# Altium PCB MB1520.PcbDoc (part 4 of 7)
Units mm, origin at the board's own origin, x right, y up, seen from the top; angles counter-clockwise.
Board outline 159 x 88 mm, 6 copper layers (Top Layer, Signal Layer 1, Signal Layer 2, Signal Layer 3, Signal Layer 4, Bottom Layer), stack 1.572 mm thick; 473 components, 377 nets, 1832 pads, 1378 vias.
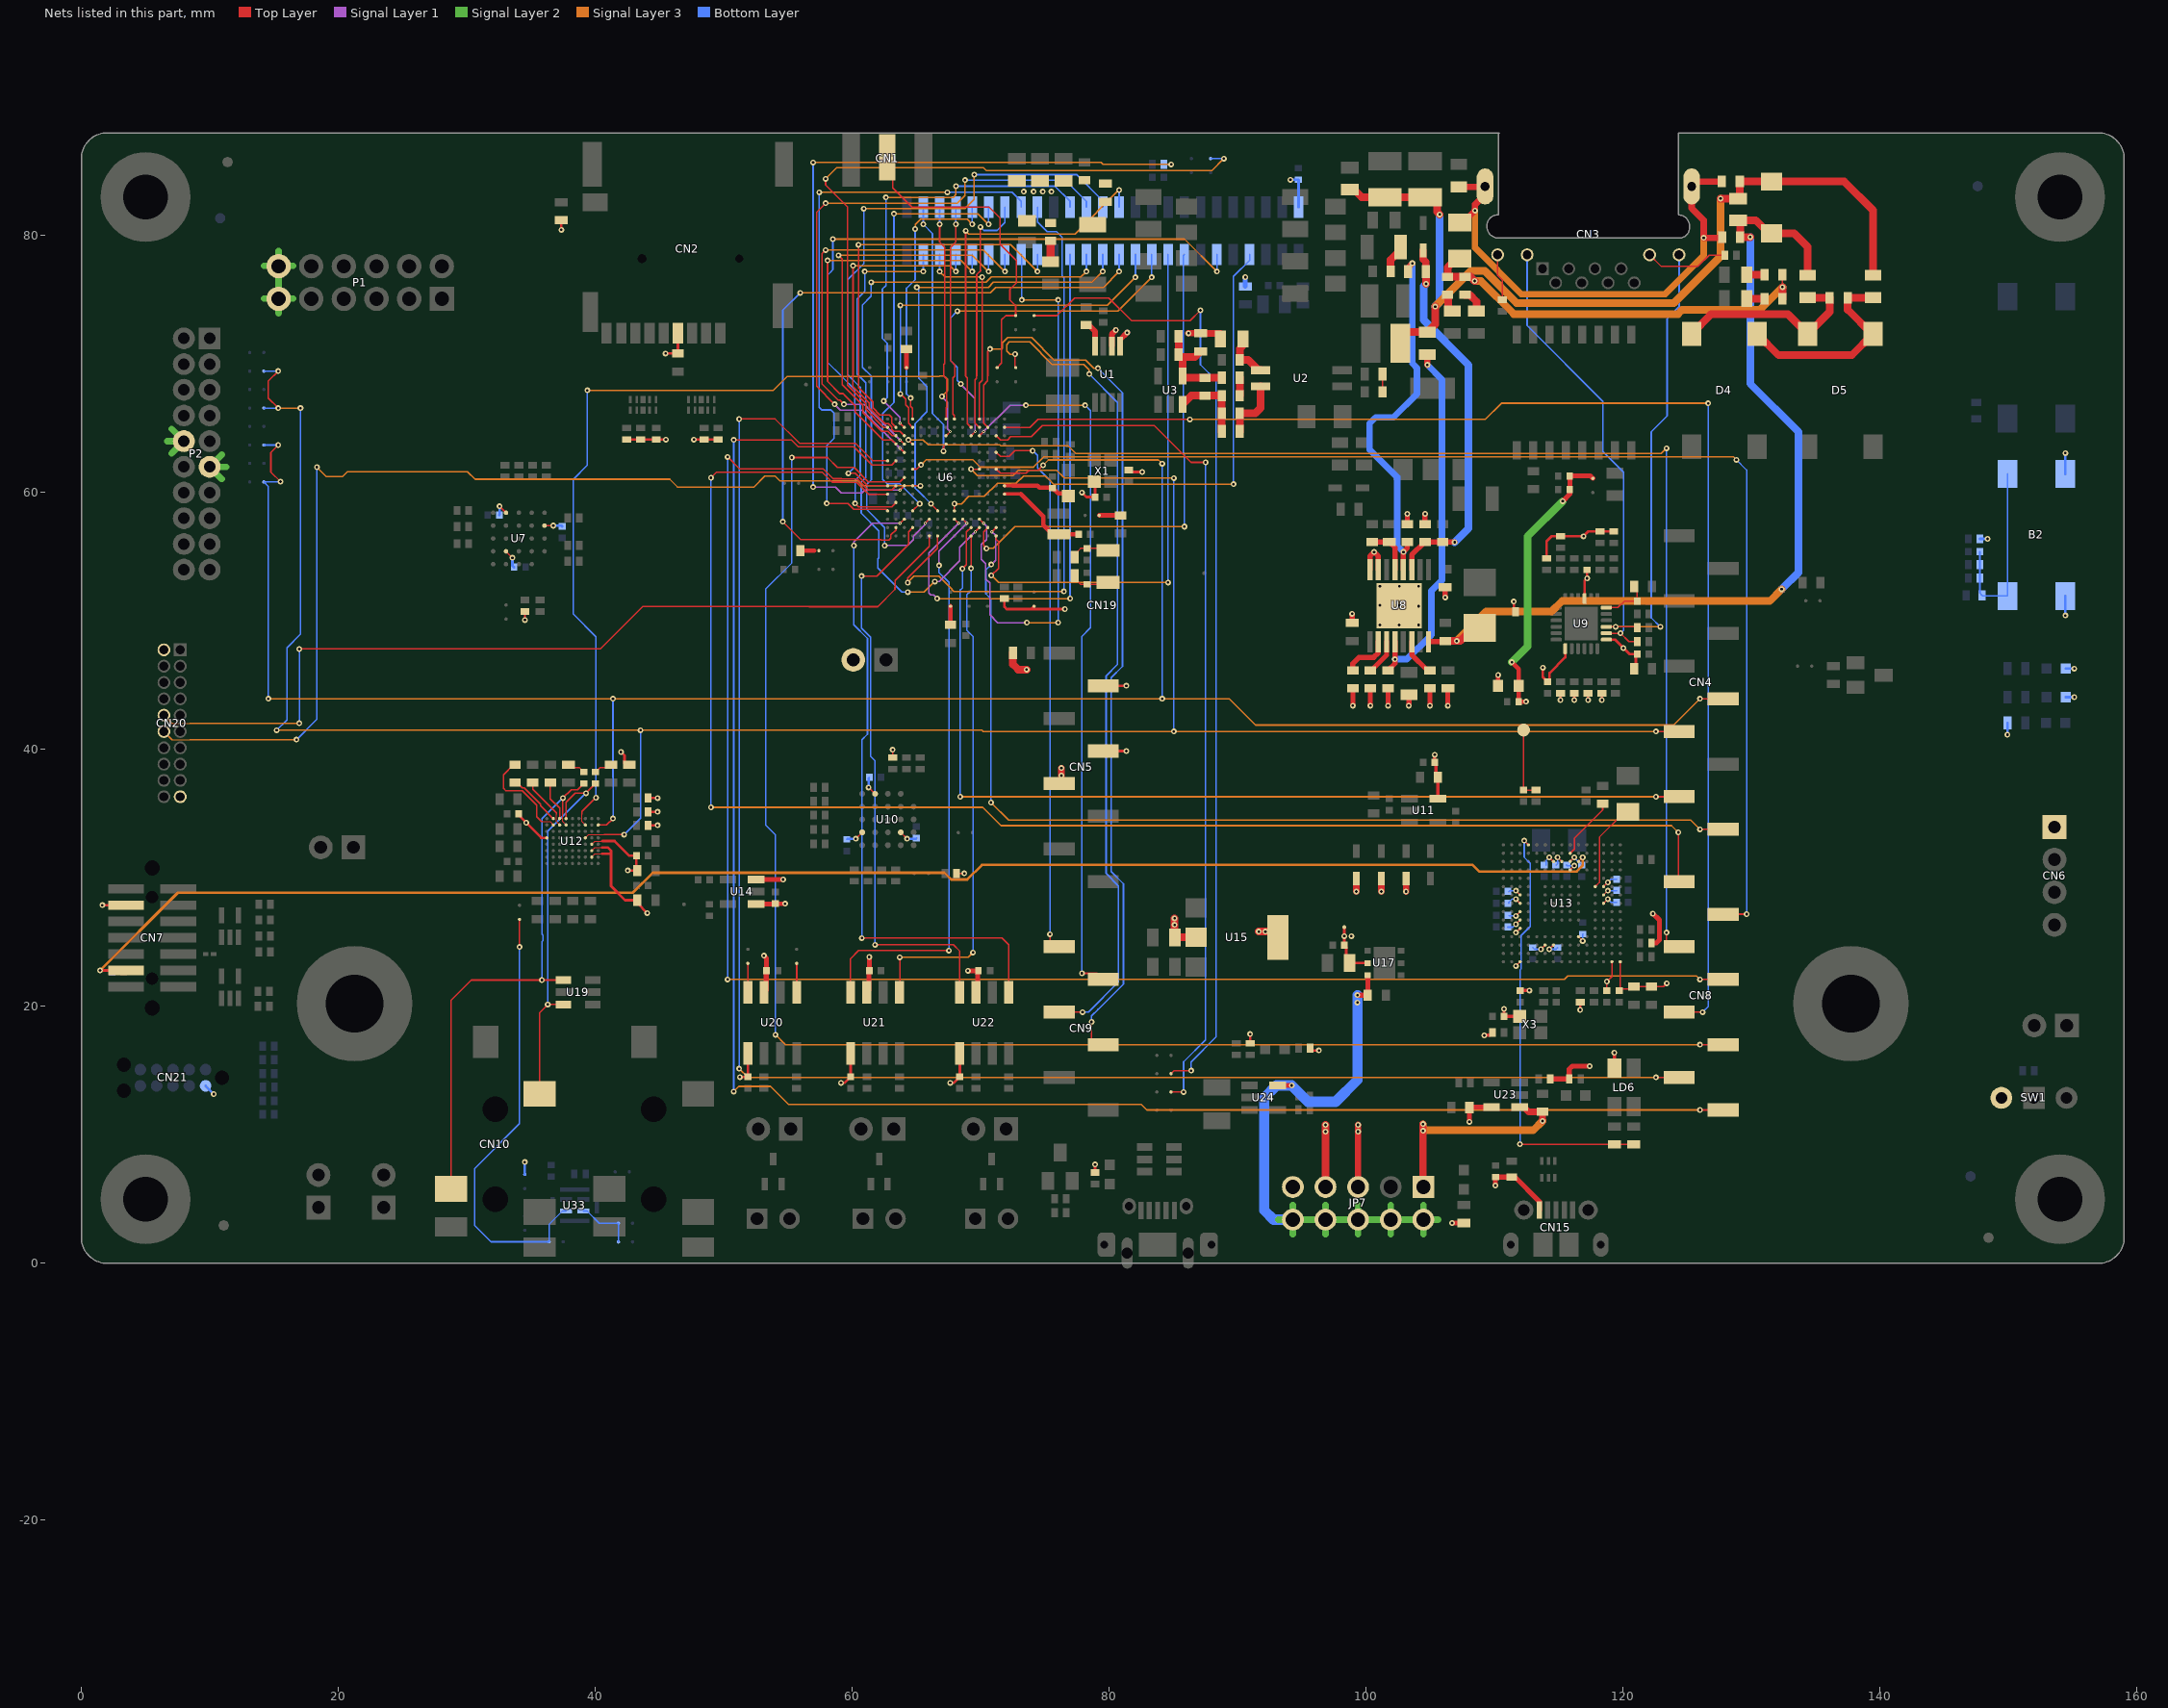
[diagram p7: the nets of this part, all layers, seen from the top]

## Via types
v1: diameter 0.45, hole 0.2, Top Layer to Bottom Layer, tented both sides, 1099 vias
v2: diameter 0.25, hole 0.1, Top Layer to Signal Layer 1, tented both sides, 217 vias
v3: diameter 0.25, hole 0.1, Signal Layer 4 to Bottom Layer, tented both sides, 53 vias
v4: diameter 0.6, hole 0.3, Top Layer to Bottom Layer, tented both sides, 9 vias

## Nets (pads, with @x,y where several pads share a name; then routed paths per layer and width w, separated by ;. In a path a pad name is that pad's centre, name@x,y a point inside that pad or via, vN(x,y) a via of type N, cw(c..) or ccw(c..) an arc to the next point about the centre after c; other vN are vias at no path point) (continued)
3V3: B2.1 B2.2 C24.1 C37.2 C46.1 C77.1 C81.1 C83.2 C87.2 C88.2 C95.1 C96.2 C109.2 C110.2 C111.2 C116.1 C132.2 C136.2 C139.2 C140.2 C141.2 C143.2 CN2.4 CN5.2 CN5.4 CN7.3 CN19.50 CN20.2 CN20.19 CN21.1 JP1.2 L4.2 LD1.1 LD2.1 P1.6 P1.12 R3.2 R27.2 R28.2 R29.2 R30.2 R31.2 R41.2 R49.2 R50.2 R51.1 R55.2 R63.1 R65.2 R67.1 R81.2 R86.1 R90.2 R92.2 R94.1 R102.2 R112.2 R117.2 R118.2 R132.2 R140.2 R145.2 SB22.1 SB36.2 SW1.2 TP5.1 U7.B4 U7.D1 U7.E4 U9.9 U10.B4 U10.D1 U10.E4 U12.B2 U12.C2 U12.D2 U12.E9 U14.1 U14.3 U17.2 U20.5 U21.5 U22.5 X1.4 | length 106.5
  Top Layer w0.09: U12.B2@39.725,31.625 39.975,31.875 40.55,31.875 ; U12.C2@39.725,32.125 39.975,32.375 40.55,32.375 ; U12.D2@39.725,32.625 39.975,32.875 40.55,32.875
  Top Layer w0.127: v1(32.55,58.925) U7.E4@33.05,58.425 ; U7.B4@33.05,55.425 v1(33.55,54.925) ; v1(34.525,50.075) R65.2@34.525,50.75 ; U7.D1@36.05,57.425 v1(36.725,57.425) ; v1(60.275,33.05) U10.E4@60.775,33.55 ; v1(61.275,37.05) U10.D1@61.775,36.55 ; R81.2@63.15,39.375 v1(63.15,39.975) ; U10.B4@63.775,33.55 v1(64.275,33.05) ; R102.2@68.125,30.35 v1(68.725,30.35)
  Top Layer w0.2: v1(1.629,27.879) CN7.3@3.479,27.879 ; C77.1@34.025,34.975 34.025,34.9 35.8,33.125 U12.E9@36.225,33.125 ; v1(37.35,80.45) R3.2@37.35,81.2 ; 40.55,31.875 41.175,31.875 41.225,31.925 ; 40.55,32.375 40.976,32.375 41.225,32.126 41.225,31.925 ; 40.55,32.875 41.5,32.875 42.65,31.725 C81.1@43.2,31.725 43.2,30.65 C83.2@43.275,30.575 v1(42.525,30.575) ; v1(42,39.8) 42.275,39.525 42.275,38.9 42.35,38.825 R86.1@42.65,38.825 ; R27.2@42.45,64.125 R28.2@43.525,64.125 R29.2@44.75,64.125 v1(45.5,64.125) ; v1(44.05,27.275) 43.275,28.05 C88.2@43.275,28.275 42.325,28.275 41.225,29.375 41.225,31.925 ; R94.1@44.1,34.1 v1(44.85,34.1) ; R92.2@44.1,35.15 v1(44.85,35.15) ; R90.2@44.1,36.225 v1(44.85,36.225) ; v1(45.475,70.825) C24.1@46.425,70.825 CN2.4@46.425,72.4 ; v1(47.675,64.125) R30.2@48.475,64.125 R31.2@49.55,64.125 ; v1(51.25,14.5) 51.85,14.5 C109.2@51.87,14.48 ; U20.5@51.87,16.35 51.875,16.345 C109.2@51.875,14.525 ; v1(59.125,14.05) 59.4,14.05 C110.2@59.875,14.525 59.875,16.345 U21.5@59.87,16.35 ; v1(67.625,14.05) 67.9,14.05 C111.2@68.375,14.525 68.375,16.345 U22.5@68.37,16.35 ; R63.1@71.85,51.75 71.85,51.098 72.023,50.925 73.925,50.925 ; SB22.1@74.15,51.15 73.925,50.925 ; v1(76.55,50.925) 73.925,50.925 ; v1(77.875,60) 78.225,59.65 C37.2@78.9,59.65 78.9,60.8 X1.4@78.85,60.85 ; R132.2@78.9,7.075 v1(78.9,7.7) ; CN5.4@79.541,39.88 v1(81.335,39.88) ; CN5.2@79.541,44.96 v1(81.335,44.96) ; R41.2@81.525,61.75 81.675,61.6 v1(82.575,61.6) ; R117.2@90.975,17.125 v1(90.975,17.85) ; R118.2@95.637,16.764 95.826,16.575 v1(96.325,16.575) ; TP5.1@98.325,26.2 TP5.1@98.3,26.175 v1(98.3,25.475) C95.1@98.3,24.775 98.45,24.625 98.45,23.625 C96.2@98.7,23.375 U17.2@100.125,23.375 ; v1(111.498,51.515) 111.498,50.852 R67.1@111.625,50.725 ; R55.2@114.05,54.875 114.05,56.225 114.425,56.6 R51.1@115.125,56.6 v1(116.925,56.6) 117.3,56.975 R49.2@118.2,56.975 R50.2@119.275,56.975 ; v1(116.661,19.731) R112.2@116.661,20.339 ; U9.9@117,51.75 117,53.125 v1(117.2,53.325) C46.1@117.2,53.975
  Top Layer w0.35: U14.1@52.525,27.975 54,27.975 C87.2@54.025,28 v1(54.775,28) ; U14.3@52.525,29.875 v1(54.625,29.875) ; L4.2@110.275,44.95 v1(110.275,45.8)
  Signal Layer 2 w0.5: 14.2,75.11 P1.6@15.35,75.11 ; 14.2,77.65 P1.12@15.35,77.65 ; 15.35,73.96 P1.6@15.35,75.11 ; 15.35,78.8 P1.12@15.35,77.65 ; 16.5,75.11 P1.6@15.35,75.11 ; 16.5,77.65 P1.12@15.35,77.65 ; P1.6@15.35,75.11 P1.12@15.35,77.65
  Bottom Layer w0.127: C143.2@59.575,33 C143.2@59.625,33.05 ; C140.2@61.275,37.775 C140.2@61.325,37.825 ; C141.2@64.95,33.05 C141.2@65,33.1
  Bottom Layer w0.2: CN21.1@9.665,13.815 v1(10.305,13.175) ; C132.2@32.525,58.25 32.55,58.275 v1(32.55,58.925) ; v1(33.55,54.925) 33.55,54.315 C139.2@33.675,54.19 ; SB36.2@34.512,6.919 v1(34.512,7.887) ; v1(36.725,57.425) 37.375,57.425 C136.2@37.425,57.375 ; C143.2@59.625,33.05 v1(60.275,33.05) ; v1(61.275,37.05) C140.2@61.275,37.775 ; v1(64.275,33.05) C141.2@64.95,33.05 ; v1(94.1,84.35) C116.1@94.725,84.35 94.74,84.335 CN19.50@94.74,82.217 ; R140.2@147.775,56.4 v1(148.375,56.4) ; v1(149.925,41.15) R145.2@149.925,42.075 ; v1(154.425,50.425) B2.1@154.425,51.95 ; B2.2@154.425,61.45 v1(154.425,63.075) ; LD1.1@154.45,44.075 v1(155.125,44.075) ; LD2.1@154.45,46.3 v1(155.125,46.3)
  other v1: 98.85,25.475 34.625,34.3
3V3_STLK: C63.2 C70.2 C101.2 C102.2 C103.2 C105.2 C106.2 C108.2 C144.2 C145.2 C146.2 C147.2 C148.2 C149.2 C150.2 C151.2 C152.2 C153.2 C154.2 C155.2 C156.2 C157.2 CN6.1 LD6.4 R115.1 U11.5 U13.C1 U13.C5 U13.C6 U13.C7 U13.C8 U13.C9 U13.F3 U13.G3 U13.G13 U13.H13 U13.J12 U13.J13 U13.K4 U13.N8 U13.N9 U13.N10 U13.P1 U13.R1 X3.4 | length 33.4
  Top Layer w0.12: v1(111.658,23.152) U13.C1@111.983,23.477 ; v1(111.658,25.752) U13.C5@111.983,26.077 ; v1(111.658,26.402) U13.C6@111.983,26.727 ; v1(111.658,27.052) U13.C7@111.983,27.377 ; v1(111.658,28.352) U13.C8@111.983,28.027 ; v1(111.658,29.002) U13.C9@111.983,28.677 ; v1(113.608,24.452) U13.F3@113.933,24.777 ; v1(114.258,24.452) U13.G3@114.583,24.777 ; v1(114.258,31.602) U13.G13@114.583,31.277 ; v1(114.908,31.602) U13.H13@115.233,31.277 ; U13.J12@115.883,30.627 v1(116.208,30.952) ; U13.J13@115.883,31.277 v1(116.208,31.602) ; U13.K4@116.533,25.427 v1(116.858,25.102) ; U13.N8@118.483,28.027 v1(118.808,28.352) ; U13.N9@118.483,28.677 v1(118.808,29.002) ; U13.N10@118.483,29.327 v1(118.808,29.652) ; C105.2@118.736,21.239 v1(118.736,21.936) 119.133,22.333 U13.P1@119.133,23.477 ; C106.2@119.686,21.239 C106.2@119.783,21.336 ; U13.R1@119.783,23.477 C106.2@119.783,21.336 ; v1(123.4,21.8) 123.139,21.539 C102.2@122.211,21.539 C101.2@120.836,21.539 120.647,21.35 119.797,21.35 C106.2@119.783,21.336
  Top Layer w0.254: v1(105.336,39.586) C63.2@105.336,38.989 105.425,38.901 105.425,38.001 C70.2@105.586,37.839 U11.5@105.586,36.189 ; v1(109.2,17.75) 109.622,17.75 R115.1@109.836,17.964 ; v1(110.736,19.811) C108.2@110.736,19.214 X3.4@111.961,19.214 ; C103.2@111.986,21.239 v1(112.711,21.239) ; v1(119.325,16.4) 119.325,15.201 LD6.4@119.336,15.189
  Bottom Layer w0.12: C155.2@111.025,26.175 111.431,26.175 v1(111.658,26.402) ; C152.2@111.111,28.014 111.111,28.111 111.352,28.352 v1(111.658,28.352) ; C150.2@111.111,28.914 111.199,29.002 v1(111.658,29.002) ; C153.2@111.125,27.05 111.127,27.052 v1(111.658,27.052) ; C157.2@112.975,24.575 113.098,24.452 v1(113.608,24.452) ; C147.2@114,31 114,31.344 v1(114.258,31.602) ; v1(114.258,24.452) 114.777,24.452 C156.2@114.9,24.575 ; C146.2@114.8,31 114.908,31.108 v1(114.908,31.602) ; C145.2@115.6,31 115.648,30.952 v1(116.208,30.952) ; v1(116.208,31.602) 116.208,31.592 C144.2@116.8,31 ; v1(116.858,25.102) 116.858,25.608 C154.2@116.875,25.625 ; v1(118.808,28.352) 119.06,28.1 C151.2@119.5,28.1 ; v1(118.808,29.002) 119.498,29.002 C149.2@119.5,29 ; v1(118.808,29.652) 119.056,29.9 C148.2@119.5,29.9
5V: C98.2 C99.2 C100.2 C107.2 CN5.5 JP7.2 JP7.4 JP7.6 JP7.8 JP7.10 P2.6 P2.15 R107.1 R134.1 R138.1 U1.1 U1.2 U17.3 U20.3 U21.3 U22.3 U24.5 | length 79.1
  Top Layer w0.381: v1(53.125,23.95) 53.325,23.75 C98.2@53.325,22.775 53.3,22.75 53.3,21.26 U20.3@53.14,21.1 ; U21.3@61.14,21.1 61.3,21.26 61.3,22.75 C99.2@61.325,22.775 v1(61.325,23.85) ; v1(69,22.775) C100.2@69.825,22.775 69.775,22.725 69.775,21.235 U22.3@69.64,21.1 ; CN5.5@76.112,37.34 CN5.5@76.3,37.529 ; U24.5@93.125,13.85 v1(94.2,13.85) ; v1(99.32,20.875) C107.2@100.125,20.875 U17.3@100.125,22.425 ; v1(106.686,3.139) R134.1@107.611,3.139 ; R107.1@122.211,24.939 122.589,24.939 122.825,25.175 122.825,26.725 v1(122.325,27.225)
  Top Layer w0.45: U1.2@80.2,71.4 80.2,72.325 v1(80.525,72.65) ; U1.1@80.85,71.4 80.85,71.9 v1(81.4,72.45)
  Top Layer w0.5: v1(76.275,38.552) 76.275,37.554 CN5.5@76.3,37.529
  Signal Layer 2 w0.5: 6.675,64 P2.15@7.975,64 ; 7.025,63.05 P2.15@7.975,64 ; 7.025,64.95 P2.15@7.975,64 ; 10.925,61.05 P2.6@9.975,62 ; 10.925,62.95 P2.6@9.975,62 ; 11.275,62 P2.6@9.975,62 ; 93.145,3.405 JP7.10@94.295,3.405 ; 94.295,2.255 JP7.10@94.295,3.405 ; 94.295,4.555 JP7.10@94.295,3.405 ; 96.835,2.255 JP7.8@96.835,3.405 ; 96.835,4.555 JP7.8@96.835,3.405 ; 99.375,2.255 JP7.6@99.375,3.405 ; 99.375,4.555 JP7.6@99.375,3.405 ; 101.915,2.255 JP7.4@101.915,3.405 ; 101.915,4.555 JP7.4@101.915,3.405 ; 104.455,2.255 JP7.2@104.455,3.405 ; 104.455,4.555 JP7.2@104.455,3.405 ; 105.605,3.405 JP7.2@104.455,3.405 ; JP7.10@94.295,3.405 JP7.8@96.835,3.405 ; JP7.8@96.835,3.405 JP7.6@99.375,3.405 ; JP7.6@99.375,3.405 JP7.4@101.915,3.405 ; JP7.4@101.915,3.405 JP7.2@104.455,3.405
  Bottom Layer w0.381: R138.1@90.6,76.05 v1(90.6,76.775)
  Bottom Layer w0.8: JP7.10@94.295,3.405 92.795,3.405 92.075,4.125 92.075,12.9 93.025,13.85 v1(94.2,13.85) 95.475,12.575 97.625,12.575 99.32,14.27 v1(99.32,20.875)
  other v1: 99.32,20.3 76.275,37.975
5V_POE: C3.2 C4.2 C5.2 C6.2 D10.1 JP7.5 R2.2 R18.2 R20.2 | length 8.8
  Top Layer w0.508: v1(86.175,72.4) 87.101,72.4 R20.2@87.111,72.389 88.661,72.389 R18.2@88.661,71.964 ; JP7.5@99.375,5.945 v1(99.375,10.778) ; v1(103.111,28.939) D10.1@103.111,29.944
  other v1: 99.375,10.25 73.35,83.425 74.125,83.425 74.825,83.425 75.5,83.425
5V_USB_CHGR: C114.2 C115.2 CN15.1 D8.1 JP7.9 R125.2 R126.2 U23.5 U30.1 | length 13.3
  Top Layer w0.4: v1(108.036,11.011) C114.2@108.036,12.139 108.061,12.164 U23.5@109.761,12.164 ; v1(110.061,6.061) C115.2@110.061,6.714 U30.1@111.336,6.714 111.586,6.714 113.475,4.826 CN15.1@113.475,4.15 ; R125.2@114.336,14.364 R126.2@115.811,14.364 115.811,15.111 116.05,15.35 v1(117.4,15.35)
  Top Layer w0.508: v1(99.236,28.939) D8.1@99.236,29.944
5V_USB_STLK: C113.2 JP7.1 U23.1 | length 17.7
  Top Layer w0.508: U23.1@111.961,12.164 112.286,12.164 112.65,11.8 C113.2@113.725,11.8 v1(113.725,11.075)
  Top Layer w0.55: v1(104.425,10.843) v1(104.425,10.315) 104.425,6.1 JP7.1@104.58,5.945
  Signal Layer 3 w0.55: v1(104.425,10.315) v1(104.425,10.843)
  Signal Layer 3 w0.6: v1@104.455,10.35 113,10.35 v1(113.725,11.075)
ADC_IN: CN1.1 SB4.1 SB41.2 | length 25.5
  Top Layer w0.127: CN1.1@62.725,86.1 62.725,84.8 63.15,84.375 63.15,83.715 64.648,82.217 70.658,82.217 71.499,81.376 71.499,79.326 72.775,78.05 72.775,76.325 72.275,75.825 72.275,75 72.725,74.55 SB41.2@72.725,73.775 71.95,73.775 71.625,73.45 71.625,70.075 SB4.1@71.275,69.725
AGND: C40.1 C41.1 C57.2 C58.2 R61.2 R69.2 U8.15 U8.16 | length 8.8
  Top Layer w0.381: R69.2@98.918,49.846 v1(98.918,50.568) ; v1(98.961,43.414) C57.2@98.961,44.764 ; v1(100.336,43.414) C58.2@100.336,44.764
  Top Layer w0.4: U8.16@100.301,53.996 100.301,55.051 v1(100.625,55.375) 100.951,55.049 U8.15@100.951,53.996 ; C40.1@103.211,57.539 v1(103.211,58.336) ; C41.1@104.586,57.539 v1(104.586,58.336) ; v1(106.157,51.84) R61.2@106.157,52.637
ARD_A0: CN9.1 U6.L2 | length 43.1
  Top Layer w0.1: U6.L2@71.2,63.125 71.525,62.8 72.225,62.8 72.675,63.25 v1(74.05,63.25)
  Top Layer w0.12: v1(75.395,25.62) 75.395,24.64 CN9.1@76.112,24.64
  Bottom Layer w0.1: v1(74.05,63.25) 74.425,62.875 74.425,61.925 75.395,60.955 75.395,52.625
  Bottom Layer w0.12: v1(75.395,25.62) 75.395,52.625
ARD_A1: CN9.2 U6.N4 | length 55.8
  Top Layer w0.12: v1(77.875,22.575) 79.066,22.575 CN9.2@79.541,22.1
  Top Layer w0.127: U6.N4@69.9,64.425 v2(70.225,64.75)
  Signal Layer 1 w0.1: v2(70.225,64.75) 72.275,66.8 v1(73.525,66.8)
  Signal Layer 3 w0.1: v1(73.525,66.8) 75.425,66.8
  Signal Layer 3 w0.12: 75.425,66.8 v1(78.125,66.8)
  Bottom Layer w0.12: v1(77.875,22.575) 77.875,48.8 78.555,49.48 78.555,66.37 v1(78.125,66.8)
ARD_A2: CN9.3 SB5.1 | length 64.7
  Top Layer w0.12: CN9.3@76.112,19.56 v1(77.928,19.56)
  Top Layer w0.13: v1(72.675,70.775) 72.675,69.775 SB5.1@72.725,69.725
  Signal Layer 3 w0.104: v1(72.675,70.775) 72.275,70.775 72.025,71.025 72.025,71.525 72.225,71.725 73.825,71.725 75.563,69.987 78.038,69.987 78.45,69.575 v1(78.45,69.225)
  Bottom Layer w0.13: v1(77.928,19.56) 78.387,19.56 80.725,21.898 80.725,29.386 79.769,30.342 79.769,45.744 80.65,46.625 80.65,67.025 v1(78.45,69.225)
ARD_A3: CN9.4 U6.P3 | length 72.6
  Top Layer w0.1: 70.542,69.083 70.542,68.692 70.225,68.375 70.225,65.4 U6.P3@70.55,65.075
  Top Layer w0.13: 70.542,69.083 70.542,70.992 v1(70.725,71.175) ; v1(78.625,18.8) 78.625,17.02 CN9.4@79.541,17.02
  Signal Layer 3 w0.104: v1(70.725,71.175) 71.625,71.175 71.694,71.244 71.694,71.662 72.088,72.056 73.962,72.056 75.7,70.318 78.175,70.318 78.818,69.675 v1(79.125,69.675)
  Bottom Layer w0.13: v1(78.625,18.8) 78.625,19.259 79.125,19.759 81.106,21.74 81.106,29.544 80.15,30.5 80.15,45.586 81.031,46.467 81.031,67.769 v1(79.125,69.675)
ARD_A4: SB32.1 SB42.2 | length 76.8
  Top Layer w0.12: SB42.2@74.15,73.775 75.925,73.775 77.3,75.15 79.975,75.15 81.75,73.375 86.29,73.375 v1(87.1,74.185) ; SB32.1@84.811,14.764 85.047,15 v1(86.375,15)
  Bottom Layer w0.12: v1(86.375,15) 86.375,15.675 88.325,17.625 88.325,68.725 87.1,69.95 v1(87.1,74.185)
ARD_A5: SB33.1 U6.N2 | length 68.8
  Top Layer w0.1: U6.N2@71.2,64.425 71.525,64.1 72.092,64.1 72.342,64.35 73.949,64.35 74.812,65.213 75.438,65.213
  Top Layer w0.12: 75.438,65.213 83.515,65.213 86.378,62.35 v1(87.5,62.35) ; SB33.1@84.811,13.339 v1(85.789,13.339)
  Bottom Layer w0.12: v1(85.789,13.339) 85.789,15.689 87.5,17.4 v1(87.5,62.35)
ARD_D0: CN8.1 U6.K14 | length 142.2
  Top Layer w0.12: v1(50.775,64.1) 55.275,64.1 55.8,63.575 60.125,63.575 61.55,62.15 63.075,62.15 U6.K14@63.4,62.475 ; v1(125.984,11.94) CN8.1@127.801,11.94
  Signal Layer 3 w0.12: v1(50.775,13.375) 51.175,13.775 53.65,13.775 55.05,12.375 82.5,12.375 82.935,11.94 v1(125.984,11.94)
  Bottom Layer w0.12: v1(50.775,13.375) v1(50.775,64.1)
ARD_D1: CN8.2 U6.K15 | length 136.9
  Top Layer w0.12: v1(51.2,65.725) 54,65.725 55.9,63.825 59.175,63.825 60.25,63.825 61.6,62.475 U6.K15@62.75,62.475 ; v1(122.555,14.48) CN8.2@124.372,14.48
  Signal Layer 3 w0.12: v1(51.2,15.15) 51.87,14.48 v1(122.555,14.48)
  Bottom Layer w0.12: v1(51.2,15.15) v1(51.2,65.725)
ARD_D2: CN8.3 U6.H13 | length 129.9
  Top Layer w0.1: 59.175,61.95 60.15,61.95 61.25,60.85 63.725,60.85 U6.H13@64.05,61.175
  Top Layer w0.12: v1(125.984,17.02) CN8.3@127.801,17.02
  Top Layer w0.127: v1(55.3,62.725) 58.076,62.725 58.851,61.95 59.175,61.95
  Signal Layer 3 w0.12: v1(54.025,17.8) 54.805,17.02 v1(125.984,17.02)
  Bottom Layer w0.12: v1(54.025,17.8) 54.025,33.351 53.252,34.125 53.252,52.476 55.3,54.525 v1(55.3,62.725)
ARD_D3: CN8.4 U6.P1 | length 104.9
  Top Layer w0.1: U6.P1@71.85,65.075 73.825,65.075 74.45,65.7 75.425,65.7
  Top Layer w0.12: CN8.4@124.372,19.56 v1(126.188,19.56)
  Top Layer w0.127: 75.425,65.7 v1(86.275,65.7)
  Signal Layer 3 w0.127: v1(86.275,65.7) 109.275,65.7 110.525,66.95 v1(126.625,66.95)
  Bottom Layer w0.12: v1(126.188,19.56) 126.625,19.997 v1(126.625,66.95)
ARD_D4: CN8.5 U6.G14 | length 132.7
  Top Layer w0.1: 59.175,61.075 60.367,61.075 61.242,60.2 63.075,60.2 U6.G14@63.4,60.525
  Top Layer w0.12: v1(50.3,62.775) 51.225,61.85 54.025,61.85 ; v1(125.984,22.1) CN8.5@127.801,22.1
  Top Layer w0.127: 54.025,61.85 57.743,61.85 58.518,61.075 59.175,61.075
  Signal Layer 3 w0.12: v1(50.3,22.1) 115.425,22.1 115.7,22.375 125.71,22.375 v1(125.984,22.1)
  Bottom Layer w0.12: v1(50.3,22.1) v1(50.3,62.775)
ARD_D5: CN8.6 U6.M12 | length 99.9
  Top Layer w0.12: v1(123.375,25.75) 123.375,24.64 CN8.6@124.372,24.64
  Top Layer w0.127: v1(64.375,64.1) U6.M12@64.7,63.775
  Signal Layer 3 w0.1: v1(64.375,64.1) 65.53,64.1 65.925,63.705 71.495,63.705 71.555,63.645 75.425,63.645
  Signal Layer 3 w0.12: 75.425,63.645 76.805,63.645 77.405,63.045 122.97,63.045 v1(123.375,63.45)
  Bottom Layer w0.12: v1(123.375,25.75) v1(123.375,63.45)
ARD_D6: CN8.7 U6.J12 | length 102.6
  Top Layer w0.12: CN8.7@127.8,27.18 v1(129.617,27.18)
  Top Layer w0.127: U6.J12@64.7,61.825 65.025,61.825 v1(65.35,62.15)
  Signal Layer 3 w0.127: v1(65.35,62.15) 65.758,62.559 69.391,62.559 69.975,61.975 74.1,61.975 74.905,62.78 128.595,62.78 v1(128.825,62.55)
  Bottom Layer w0.12: v1(128.825,62.55) 129.617,61.758 v1(129.617,27.18)
ARD_D7: CN8.8 U6.F15 | length 120.2
  Top Layer w0.1: 59.175,60.812 60.347,60.812 61.284,59.875 U6.F15@62.75,59.875
  Top Layer w0.12: v1(124.3,33.55) 124.3,29.793 CN8.8@124.372,29.72
  Top Layer w0.127: v1(49,61.15) 49.425,61.575 57.669,61.575 58.431,60.812 59.175,60.812
  Signal Layer 3 w0.12: v1(49,35.5) 70.15,35.5 71.575,34.075 123.775,34.075 v1(124.3,33.55)
  Bottom Layer w0.127: v1(49,35.5) v1(49,61.15)
ARD_D8: CN4.1 U6.B2 | length 80
  Top Layer w0.12: v1(125.984,33.784) CN4.1@127.801,33.784
  Top Layer w0.127: v2(70.875,56.95) U6.B2@71.2,57.275
  Signal Layer 1 w0.1: v1(70.825,54.4) 71.15,54.725 71.15,56.675 v2(70.875,56.95)
  Signal Layer 3 w0.12: v1(70.8,35.875) 72.175,34.5 125.269,34.5 v1(125.984,33.784)
  Bottom Layer w0.12: v1(70.8,35.875) 70.8,51.725 70.4,52.125 70.4,53.975 v1(70.825,54.4)
ARD_D9: CN4.2 U6.B5 | length 77.3
  Top Layer w0.1: v1(68.575,54.075) 68.9,54.4 68.9,56.925 U6.B5@69.25,57.275
  Top Layer w0.12: v1(122.555,36.324) CN4.2@124.372,36.324
  Signal Layer 3 w0.12: v1@68.376,36.324 v1(122.555,36.324) ; v1@68.376,36.325 v1(68.4,36.325)
  Bottom Layer w0.1: 68.575,52.625 v1(68.575,54.075)
  Bottom Layer w0.12: v1(68.4,36.325) 68.4,52.4 68.575,52.575 68.575,52.625
ARD_D11: CN4.4 SB12.1 SB15.1 U6.J4 U12.E3 | length 191.1
  Top Layer w0.09: U12.E3@39.225,33.125 39.475,33.375 40.675,33.375
  Top Layer w0.1: 40.675,33.375 v1(42.25,33.375) ; v1(69.25,61.825) U6.J4@69.9,61.825
  Top Layer w0.12: v1(15.325,66.575) 14.55,67.35 14.55,68.675 v1(15.325,69.45) ; v1(122.555,41.404) CN4.4@124.372,41.404
  Signal Layer 3 w0.1: v1(69.25,61.825) 69.757,61.318 72.518,61.318 72.925,61.725 75.402,61.725 75.407,61.72 75.425,61.72
  Signal Layer 3 w0.12: v1(15.2,41.5) v1(43.525,41.5) 70.1,41.5 70.196,41.404 v1(85.025,41.404) v1(122.555,41.404) ; v1(15.325,66.575) v1(17.05,66.575) ; 75.425,61.72 75.93,61.72 76.525,61.125 v1(85.025,61.125)
  Bottom Layer w0.1: v1(42.25,33.375) 43.525,34.65 43.525,37.8
  Bottom Layer w0.12: SB12.1@14.2,66.575 v1(15.325,66.575) ; SB15.1@14.2,69.45 v1(15.325,69.45) ; v1(15.2,41.5) 15.995,42.295 15.995,47.92 17.05,48.975 v1(17.05,66.575) ; 43.525,37.8 v1(43.525,41.5) ; v1(85.025,41.404) v1(85.025,61.125)
ARD_D12: CN4.5 SB6.1 SB8.1 U6.J2 U12.G1 | length 180.2
  Top Layer w0.1: U12.G1@40.225,34.125 40.875,34.125 v1(41.375,34.625) ; U6.J2@71.2,61.825 71.525,61.5 73.525,61.5 73.775,61.75 74.475,61.75 v1(74.85,62.125)
  Top Layer w0.12: v1(15.325,63.7) 14.75,63.125 14.75,61.589 v1(15.491,60.847) ; v1(125.984,43.944) CN4.5@127.801,43.944
  Signal Layer 3 w0.12: v1(14.55,43.944) v1(41.375,43.944) v1(84.125,43.944) 89.356,43.944 91.4,41.9 123.94,41.9 v1(125.984,43.944) ; v1(74.85,62.125) 75.261,62.536 83.839,62.536 v1(84.125,62.25)
  Bottom Layer w0.1: v1(41.375,34.625) 41.375,37.8
  Bottom Layer w0.12: SB6.1@14.2,60.825 14.55,60.475 v1(14.55,43.944) ; SB8.1@14.2,63.7 v1(15.325,63.7) ; 14.366,60.847 v1(15.491,60.847) ; 41.375,37.8 v1(41.375,43.944) ; v1(84.125,43.944) v1(84.125,62.25)
Audio_Int: U6.N8 U12.G3 | length 69.2
  Top Layer w0.09: 38.975,34.95 38.975,34.375 U12.G3@39.225,34.125
  Top Layer w0.1: 38.975,34.95 38.975,35.175 v1(40.05,36.25)
  Top Layer w0.127: U6.N8@67.3,64.425 v2(67.625,64.75)
  Signal Layer 1 w0.1: v1(66.975,67.475) 67.425,67.025 67.425,64.95 v2(67.625,64.75)
  Signal Layer 3 w0.12: v1(39.375,67.95) 53.85,67.95 54.925,69.025 66.75,69.025 66.805,69.08 67.143,69.08 67.273,68.95 67.275,68.95 67.425,68.8 67.425,67.925 v1(66.975,67.475)
  Bottom Layer w0.1: v1(40.05,36.25) 40.05,37.8
  Bottom Layer w0.12: v1(39.375,67.95) 39.375,62.125 38.276,61.026 38.276,50.55 40.05,48.776 40.05,37.8
Chassis: C8.1 C10.1 C13.2 CN3.SH1 CN3.SH2 R1.1 | length 39
  Top Layer w0.5: R1.1@107.211,83.789 109.224,83.789 CN3.SH1@109.26,83.825 109.26,83.21 108.475,82.425 v1(108.475,81.953) 107.536,81.014 C10.1@107.286,81.014 ; C8.1@127.686,84.214 125.729,84.214 CN3.SH2@125.34,83.825 125.34,82.135 126.275,81.2 v1(126.275,79.825) 127.647,79.825 C13.2@127.711,79.889
  Signal Layer 3 w0.5: v1(108.475,81.953) 108.475,79.04 112.065,75.45 123.275,75.45 126.275,78.45 v1(126.275,79.825)
CTP_INT: CN19.39 U6.G15 | length 55.2
  Top Layer w0.1: v1(59.7,61.502) 60.223,61.502 61.2,60.525 U6.G15@62.75,60.525
  Signal Layer 3 w0.12: v1(58.488,79.725) 85.865,79.725 v1(88.39,77.2)
  Bottom Layer w0.1: 59.175,69.046 59.2,69.021
  Bottom Layer w0.12: 58.336,77.187 58.079,76.93 58.079,70.142 59.175,69.046
  Bottom Layer w0.127: 58.336,77.187 58.488,77.339 v1(58.488,79.725) ; 59.2,69.021 60.2,68.021 60.2,62.002 v1(59.7,61.502) ; v1(88.39,77.2) CN19.39@88.39,78.531
DETECTn: CN20.10 U6.A10 | length 70.1
  Top Layer w0.1: 63.325,52.625 63.325,53.15 66,55.825 U6.A10@66,56.625
  Top Layer w0.12: v1(16.962,47.825) 40.375,47.825 43.669,51.119 56.625,51.119
  Top Layer w0.127: 56.625,51.119 61.981,51.119 63.325,52.463 63.325,52.625
  Signal Layer 3 w0.09: 7.06,42.037 8.45,42.037
  Signal Layer 3 w0.12: 8.45,42.037 v1(16.962,42.037)
  Signal Layer 3 w0.127: CN20.10@6.425,42.672 7.06,42.037
  Bottom Layer w0.12: v1(16.962,42.037) v1(16.962,47.825)
E5V: C94.2 D9.1 JP7.7 R72.1 U15.2 U15.4 | length 12.8
  Top Layer w0.508: v1(101.186,28.939) D9.1@101.186,29.944
  Top Layer w0.6: R72.1@72.511,47.514 72.511,46.639 72.925,46.225 v1(73.575,46.225) ; v1(85.096,26.864) 85.096,25.379 C94.2@85.1,25.375 U15.2@86.775,25.375 ; v1(91.65,25.825) 92.675,25.825 U15.4@93.125,25.375 ; JP7.7@96.835,5.945 v1(96.835,10.778)
  other v1: 96.835,10.25 92.163,25.825 85.096,26.35
FDCAN1_RX: U6.B12 U22.4 | length 45.3
  Top Layer w0.1: v1(60.725,53.5) 61.917,53.5 64.375,55.958 64.375,56.95 U6.B12@64.7,57.275
  Top Layer w0.12: v1(61.775,24.8) 67.875,24.8 68.37,24.305 U22.4@68.37,21.1
  Bottom Layer w0.12: v1(60.725,53.5) 60.725,49.439 61.425,48.739 61.425,39.475 61.775,39.125 v1(61.775,24.8)
FDCAN1_TX: U6.C13 U22.1 | length 51.4
  Top Layer w0.12: v1(60.75,25.325) 71.65,25.325 72.18,24.795 U22.1@72.18,21.1
  Top Layer w0.127: v2(63.725,57.6) U6.C13@64.05,57.925
  Signal Layer 1 w0.1: v1(60.125,55.875) 60.125,56.15 61.575,57.6 v2(63.725,57.6)
  Bottom Layer w0.12: v1(60.125,55.875) 60.125,49.7 61.185,48.64 61.185,41.185 60.75,40.75 v1(60.75,25.325)
FDCAN2_RX: U6.C6 U21.4 | length 45.5
  Top Layer w0.12: U21.4@59.87,21.1 59.87,23.72 60.5,24.35 v1(67.525,24.35)
  Top Layer w0.127: U6.C6@68.6,57.925 v2(68.925,57.6)
  Signal Layer 1 w0.1: v1(66.75,54.325) 66.75,55.425 v2(68.925,57.6)
  Bottom Layer w0.12: v1(66.75,54.325) 66.75,53.775 67.525,53 v1(67.525,24.35)
FDCAN2_TX: U6.A5 U21.1 | length 41.3
  Top Layer w0.1: v1(69.25,54.1) U6.A5@69.25,56.625
  Top Layer w0.12: U21.1@63.68,21.1 63.7,21.12 v1(63.7,23.825)
  Signal Layer 3 w0.12: v1(63.7,23.825) 69.025,23.825 v1(69.405,24.205)
  Bottom Layer w0.1: 69.25,52.625 v1(69.25,54.1)
  Bottom Layer w0.12: 69.25,52.625 69.25,52.375 68.925,52.05 68.925,49.275 69.405,48.795 v1(69.405,24.205)
FDCAN3_RX: SB29.1 U20.4 | length 2.3
  Top Layer w0.12: U20.4@51.87,21.1 51.87,23.345 SB29.1@51.875,23.35
FDCAN3_TX: SB30.1 U20.1 | length 2.3
  Top Layer w0.12: SB30.1@55.675,23.35 55.68,23.345 U20.1@55.68,21.1
GNDDetect: CN7.11 R146.2 U13.K13 | length 123.7
  Top Layer w0.12: U13.K13@116.533,31.277 v1(116.858,31.602)
  Top Layer w0.2: v1(1.45,22.8) CN7.11@3.479,22.799
  Signal Layer 3 w0.2: v1(1.45,22.8) 7.5,28.85 42.925,28.85 44.475,30.4 67.175,30.4 67.7,29.875 68.95,29.875 70.089,31.014 108.286,31.014 108.793,30.507 112.492,30.507 116.392,30.507 116.858,30.972 v1(116.858,31.602)
  Bottom Layer w0.2: v1(1.45,22.8) 2.376,22.8 R146.2@2.386,22.789
LCD_B0: CN19.21 U6.C7 | length 44.8
  Top Layer w0.127: U6.C7@67.95,57.925 v2(68.275,57.6)
  Signal Layer 1 w0.1: v1(66.6,51.75) 66.32,52.03 66.12,52.03 65.978,52.172 65.978,55.303 v2(68.275,57.6)
  Signal Layer 3 w0.102: v1(66.6,51.75) v1(76.96,51.75)
  Bottom Layer w0.127: v1(76.96,51.75) CN19.21@76.96,78.531
LCD_B1: CN19.23 U6.C10 | length 44.7
  Top Layer w0.127: v2(65.675,57.6) U6.C10@66,57.925
  Signal Layer 1 w0.1: v1(62.525,55.875) 64.3,55.875 64.778,56.353 64.778,56.619 65.675,57.516 v2(65.675,57.6)
  Signal Layer 3 w0.102: v1(61.477,76.373) 70.423,76.373 70.825,76.775 77.805,76.775 v1(78.23,77.2)
  Bottom Layer w0.127: v1(61.477,76.373) 61.477,75.277 60.802,74.602 60.802,69.748 61.481,69.069 61.481,61.006 61.121,60.646 61.121,58.682 62.525,57.279 v1(62.525,55.875) ; v1(78.23,77.2) CN19.23@78.23,78.531
LCD_B2: CN19.25 U6.D9 | length 35.2
  Top Layer w0.127: v1(66.125,59.125) 66.125,59.1 U6.D9@66.65,58.575
  Signal Layer 3 w0.102: v1@65,75.971 v1(65.025,75.971) 70.59,75.971 70.992,76.373 78.673,76.373 v1(79.5,77.2)
  Bottom Layer w0.127: v1(65.025,75.971) 65.166,75.83 65.166,68.909 65.82,68.255 65.82,66.295 64.891,65.366 64.891,60.356 65.131,60.116 65.134,60.116 v1(66.125,59.125) ; v1(79.5,77.2) CN19.25@79.5,78.531
LCD_B3: CN19.27 U6.B14 | length 55.3
  Top Layer w0.1: 59.002,56.35 62.2,56.35 62.25,56.3 62.87,56.3 63.02,56.45 63.02,56.72 63.4,57.1 U6.B14@63.4,57.275
  Top Layer w0.127: v1(54.6,57.725) 55.975,56.35 59.002,56.35
  Signal Layer 3 w0.102: v1(55.95,75.55) 70.737,75.55 71.158,75.971 79.541,75.971 v1(80.77,77.2)
  Bottom Layer w0.127: v1(54.6,57.725) 54.6,74.2 v1(55.95,75.55) ; v1(80.77,77.2) CN19.27@80.77,78.531
LCD_B4: CN19.29 U6.P12 | length 30.9
  Top Layer w0.1: v1(63.75,67.675) 64.155,67.27 64.155,66.807 64.375,66.587 64.375,65.4 U6.P12@64.7,65.075
  Signal Layer 3 w0.102: v1(63.75,74.575) 79.855,74.575 v1(82.04,76.76)
  Bottom Layer w0.127: v1(63.75,67.675) v1(63.75,74.575) ; v1(82.04,76.76) CN19.29@82.04,78.531
LCD_B5: CN19.31 U6.N5 | length 28.9
  Top Layer w0.127: U6.N5@69.25,64.425 v2(69.575,64.75)
  Signal Layer 1 w0.1: v1(68.45,68.45) 69.575,67.325 v2(69.575,64.75)
  Signal Layer 3 w0.102: v1(68.175,74.125) 80.675,74.125 v1(83.31,76.76)
  Bottom Layer w0.127: v1(68.175,74.125) 67.636,73.586 67.636,70.289 68.175,69.75 68.175,68.725 v1(68.45,68.45) ; v1(83.31,76.76) CN19.31@83.31,78.531
LCD_B6: CN19.33 U6.A2 | length 42.9
  Top Layer w0.1: v1(70.825,53.55) 71.375,54.1 71.375,56.175 71.2,56.35 U6.A2@71.2,56.625
  Signal Layer 3 w0.1: v1(70.825,53.55) 71.375,53 75.425,53
  Signal Layer 3 w0.102: 75.425,53 v1(84.58,53)
  Bottom Layer w0.127: v1(84.58,53) CN19.33@84.58,78.531
LCD_B7: CN19.35 U6.B3 | length 39.2
  Top Layer w0.1: v1(70.45,55.65) 70.225,55.875 70.225,56.95 U6.B3@70.55,57.275
  Signal Layer 3 w0.1: v1(70.45,55.65) 70.967,55.65 72.667,57.35 75.425,57.35
  Signal Layer 3 w0.102: 75.425,57.35 v1(85.85,57.35)
  Bottom Layer w0.127: v1(85.85,57.35) 85.853,57.353 85.853,63.022 85.766,63.109 85.766,78.448 CN19.35@85.85,78.531
LCD_BL_CTRL: CN19.43 U6.D7 | length 41.8
  Top Layer w0.127: U6.D7@67.95,58.575 v1(67.95,59.125)
  Signal Layer 3 w0.1: v1(67.95,59.125) 68.5,59.125 69.075,59.7 70.284,59.7 71.309,60.725 72.75,60.725 73.325,61.3 75.025,61.3 75.425,60.9
  Signal Layer 3 w0.12: 75.425,60.9 75.675,60.65 v1(89.675,60.65)
  Bottom Layer w0.127: v1(89.675,60.65) 89.675,76.825 90.93,78.08 CN19.43@90.93,78.531
LCD_CLK: R136.2 U6.G13 | length 61.3
  Top Layer w0.127: v2(63.725,60.2) U6.G13@64.05,60.525
  Signal Layer 1 w0.1: v1(56.95,60.425) 58.679,60.425 59.129,59.975 60.75,59.975 60.975,60.2 v2(63.725,60.2)
  Signal Layer 3 w0.102: v1(56.95,85.7) 79.375,85.7 79.525,85.55 v1(84.825,85.55)
  Bottom Layer w0.127: v1(56.95,60.425) v1(56.95,85.7) ; R136.2@84.25,85.55 v1(84.825,85.55)
LCD_DE: CN19.22 U6.P13 | length 35
  Top Layer w0.127: v2(63.725,65.4) U6.P13@64.05,65.075
  Signal Layer 1 w0.1: v1(62.45,67.125) 63.725,65.85 v2(63.725,65.4)
  Signal Layer 3 w0.102: v1(62.625,82.973) 67.873,82.973 68.075,83.175 v1(68.075,83.85)
  Bottom Layer w0.127: v1(62.45,67.125) 62.725,67.4 62.725,71.625 62.35,72 62.35,75.85 62.625,76.125 v1(62.625,82.973) ; v1(68.075,83.85) 75.775,83.85 76.96,82.665 CN19.22@76.96,82.217
LCD_DISP: CN19.24 U6.L13 | length 46.4
  Top Layer w0.127: v1(57.925,82.525) 57.225,81.825 57.225,68.275 v1(58.625,66.875) ; v2(63.725,63.45) U6.L13@64.05,63.125
  Signal Layer 1 w0.1: v1(58.625,66.875) 59.075,66.425 60.75,66.425 v2(63.725,63.45)
  Signal Layer 3 w0.102: v1(57.925,82.525) 68.175,82.525 68.775,83.125 v1(68.775,84.325)
  Bottom Layer w0.127: v1(68.775,84.325) 76.575,84.325 78.23,82.67 CN19.24@78.23,82.217
LCD_G0: CN19.4 U6.M8 | length 20.3
  Top Layer w0.127: v1(67.1,63.225) 67.1,63.575 U6.M8@67.3,63.775
  Bottom Layer w0.127: CN19.4@65.53,82.217 v1(65.53,80.886) 66.246,80.169 66.246,66.154 67.1,65.3 v1(67.1,63.225)
LCD_G1: CN19.6 U6.R8 | length 16.8
  Top Layer w0.1: 67.125,69.075 67.35,68.85 67.35,66.65 67.3,66.6 U6.R8@67.3,65.725
  Top Layer w0.127: v1(66.8,80.886) 66.8,79.5 67.209,79.091 67.209,70.059 67.125,69.975 67.125,69.075
  Bottom Layer w0.127: v1(66.8,80.886) CN19.6@66.8,82.217
LCD_G2: CN19.8 U6.R7 | length 16.9
  Top Layer w0.1: U6.R7@67.95,65.725 67.95,66 67.825,66.125 67.825,68.921 67.979,69.075
  Top Layer w0.127: 67.979,69.075 67.979,69.946 67.636,70.289 67.636,79.069 68.07,79.503 v1(68.07,80.886)
  Bottom Layer w0.127: v1(68.07,80.886) CN19.8@68.07,82.217
LCD_G3: CN19.10 U6.R12 | length 21.7
  Top Layer w0.1: v1(64.55,67.35) 64.55,66.695 64.7,66.545 U6.R12@64.7,65.725
  Signal Layer 3 w0.102: v1(64.895,80.52) 64.895,80.87 65.307,81.282 68.944,81.282 v1(69.34,80.886)
  Bottom Layer w0.127: v1(64.55,67.35) 64.225,67.675 64.225,75.9 64.895,76.57 v1(64.895,80.52) ; v1(69.34,80.886) CN19.10@69.34,82.217
LCD_G4: CN19.12 U6.D12 | length 34.5
  Top Layer w0.127: U6.D12@64.7,58.575 v1(65.25,59.125)
  Signal Layer 3 w0.102: v1(63.25,81.7) 69.796,81.7 v1(70.61,80.886)
  Bottom Layer w0.127: v1(63.25,81.7) 63.25,67.025 62.375,66.15 62.375,61.025 62.725,60.675 63.7,60.675 v1(65.25,59.125) ; v1(70.61,80.886) CN19.12@70.61,82.217
LCD_G5: CN19.14 U6.P4 | length 19.4
  Top Layer w0.1: 69.687,69.075 69.687,68.887 69.575,68.775 69.575,65.4 U6.P4@69.9,65.075
  Top Layer w0.127: 69.687,69.075 69.687,76.962 70,77.275 69.975,77.3 v1(69.975,80.675)
  Bottom Layer w0.127: v1(69.975,80.675) 70.25,80.4 71.271,80.4 71.88,81.009 CN19.14@71.88,82.217
LCD_G6: CN19.16 U6.D15 | length 46.8
  Top Layer w0.1: 59.175,59.15 59.675,59.15 60.125,58.7 62.625,58.7 U6.D15@62.75,58.575
  Top Layer w0.127: v1(58.013,59.15) 59.175,59.15
  Signal Layer 3 w0.102: v1(57.425,83.375) v1(67.4,83.375)
  Bottom Layer w0.127: v1(57.425,83.375) 57.425,66.65 57.65,66.425 58.35,66.425 58.575,66.2 58.575,64.225 58.013,63.662 v1(58.013,59.15) ; v1(67.4,83.375) 72.45,83.375 73.15,82.675 CN19.16@73.15,82.217
LCD_G7: CN19.18 U6.A9 | length 48.6
  Top Layer w0.1: v1(64.325,52.988) 64.325,53.35 66.65,55.675 U6.A9@66.65,56.625
  Signal Layer 3 w0.1: v1(64.325,52.988) 64.812,53.475 66.75,53.475 67.6,52.625
  Signal Layer 3 w0.102: 67.6,52.625 67.925,52.3 v1(76.475,52.3)
  Bottom Layer w0.127: CN19.18@74.42,82.217 74.42,81.055 75.175,80.3 75.9,80.3 76.325,79.875 76.325,76.875 76.475,76.725 v1(76.475,52.3)
LCD_HSYNC: CN19.26 U6.E14 | length 49.6
  Top Layer w0.1: v1(60.225,59.15) 60.475,58.9 63.075,58.9 U6.E14@63.4,59.225
  Signal Layer 3 w0.102: v1(60.895,82.1) 60.897,82.102 68.777,82.102 69.5,82.825 v1(69.5,84.752)
  Bottom Layer w0.127: v1(60.225,59.15) 60.225,60.958 60.627,61.36 60.627,68.198 59.633,69.192 59.633,76.557 60.895,77.82 v1(60.895,82.1) ; v1(69.5,84.752) 77.448,84.752 79.5,82.7 CN19.26@79.5,82.217
LCD_R0: CN19.3 U6.B4 | length 41.6
  Top Layer w0.1: v2(69.575,56.95) U6.B4@69.9,57.275
  Signal Layer 1 w0.1: v1(66.425,53.075) 66.775,53.075 68.375,54.675 68.375,55.75 v2(69.575,56.95)
  Signal Layer 3 w0.1: 65.975,52.625 v1(66.425,53.075)
  Signal Layer 3 w0.102: v1(60.975,77.2) v1(65.53,77.2) ; v1(64.325,52.25) 65.6,52.25 65.975,52.625
  Bottom Layer w0.127: v1(60.975,77.2) 60.975,75.675 60.375,75.075 60.375,69.225 61.054,68.546 61.054,61.183 60.694,60.823 60.694,58.405 62.075,57.025 62.075,54.92 61.987,54.832 61.987,54.138 63.875,52.25 v1(64.325,52.25) ; v1(65.53,77.2) CN19.3@65.53,78.531
LCD_R1: CN19.5 U6.R4 | length 16
  Top Layer w0.1: U6.R4@69.9,65.725 69.9,68.525 70.114,68.739 70.114,69.075
  Top Layer w0.127: 70.114,69.075 v1(70.114,76.775)
  Signal Layer 3 w0.102: v1(66.8,77.2) 67.225,76.775 v1(70.114,76.775)
  Bottom Layer w0.127: v1(66.8,77.2) CN19.5@66.8,78.531
LCD_R2: CN19.7 U6.N13 | length 24.9
  Top Layer w0.1: 60.06,69.075 60.06,68.24 61.309,66.991 61.309,66.609 62.558,65.359 62.827,65.359 63.075,65.111 63.075,64.9 63.225,64.75 63.725,64.75 U6.N13@64.05,64.425
  Top Layer w0.127: 60.06,69.075 v1(60.06,77.661)
  Signal Layer 3 w0.102: v1(60.06,77.661) 67.609,77.661 v1(68.07,77.2)
  Bottom Layer w0.127: v1(68.07,77.2) CN19.7@68.07,78.531
LCD_R3: CN19.9 U6.M14 | length 30
  Top Layer w0.1: 59.375,67.625 60.25,66.75 60.25,66.25 62.4,64.1 63.075,64.1 U6.M14@63.4,63.775
  Top Layer w0.127: v1(58.079,78.063) 58.079,68.65 59.03,67.699 59.301,67.699 59.375,67.625
  Signal Layer 3 w0.102: v1(58.079,78.063) 68.477,78.063 v1(69.34,77.2)
  Bottom Layer w0.127: v1(69.34,77.2) CN19.9@69.34,78.531
LCD_R4: CN19.11 U6.N14 | length 29.9
  Top Layer w0.1: 59.213,69.075 59.213,68.412 60.825,66.8 60.825,66.241 62.291,64.775 62.761,64.775 63.111,64.425 U6.N14@63.4,64.425
  Top Layer w0.127: v1(58.926,78.465) 59.213,78.178 59.213,69.075
  Signal Layer 3 w0.102: v1(58.926,78.465) 69.345,78.465 v1(70.61,77.2)
  Bottom Layer w0.127: v1(70.61,77.2) CN19.11@70.61,78.531
LCD_R5: CN19.13 U6.M13 | length 34.9
  Top Layer w0.127: v1(57.925,78.875) 57.652,78.602 57.652,68.452 58.906,67.198 59.027,67.198 v1(59.35,66.875) ; v2(63.725,64.1) U6.M13@64.05,63.775
  Signal Layer 1 w0.1: v1(59.35,66.875) 60.95,66.875 v2(63.725,64.1)
  Signal Layer 3 w0.102: v1(57.925,78.875) 70.205,78.875 v1(71.88,77.2)
  Bottom Layer w0.127: v1(71.88,77.2) CN19.13@71.88,78.531
LCD_R6: CN19.15 U6.C4 | length 45.2
  Top Layer w0.127: U6.C4@69.9,57.925 v2(70.225,57.6)
  Signal Layer 1 w0.1: v2(70.225,57.6) 70.45,57.375 70.45,56.35 70.055,55.955 70.055,54.795 70.375,54.475 70.375,53.275 70.7,52.95 70.7,50.488 71.313,49.875 v1(73.6,49.875)
  Signal Layer 3 w0.102: v1(73.2,75.001) v1(76.025,75.001) ; v1(73.6,49.875) v1(76.025,49.875)
  Bottom Layer w0.127: CN19.15@73.15,78.531 73.2,78.481 v1(73.2,75.001) ; v1(76.025,49.875) v1(76.025,75.001)
LCD_R7: CN19.17 U6.P14 | length 32
  Top Layer w0.1: 60.487,69.075 60.487,68.176 61.6,67.063 61.6,66.6 62.15,66.05 62.875,66.05 63.075,65.85 63.075,65.4 U6.P14@63.4,65.075
  Top Layer w0.127: 60.487,69.075 v1(60.487,79.286)
  Signal Layer 3 w0.102: v1(60.487,79.286) 72.334,79.286 v1(74.42,77.2)
  Bottom Layer w0.127: v1(74.42,77.2) CN19.17@74.42,78.531
LCD_RST: SB43.2 U6.P15 | length 54.4
  Top Layer w0.1: 59.636,69.075 59.636,68.364 61.054,66.946 61.054,66.471 62.45,65.075 U6.P15@62.75,65.075
  Top Layer w0.12: v1(57.925,84.425) 57.925,83.95 59.636,82.239 59.636,69.075
  Signal Layer 3 w0.12: v1(57.925,84.425) 58.775,85.275 70.225,85.275 70.45,85.05 87.975,85.05 v1(88.925,86)
  Bottom Layer w0.12: SB43.2@87.9,86 v1(88.925,86)
LCD_VSYNC: CN19.28 U6.P5 | length 30.3
  Top Layer w0.1: 68.833,69.092 68.833,69.025 68.95,68.908 68.95,65.375 U6.P5@69.25,65.075
  Top Layer w0.127: 68.833,69.092 v1(68.833,80.374)
  Signal Layer 3 w0.102: v1@68.833,80.383 69.08,80.136 77.358,80.136 v1(80.77,83.548)
  Bottom Layer w0.127: CN19.28@80.77,82.217 v1(80.77,83.548)
LED_G_A: CN3.12 R70.1 U9.3 | length 36
  Top Layer w0.12: U9.3@118.7,49.55 121.025,49.55 R70.1@121.1,49.475
  Signal Layer 3 w0.127: v1(119.425,49.55) v1(122.9,49.55)
  Bottom Layer w0.127: v1(122.9,49.55) 122.2,50.25 122.2,64.739 123.425,65.964 123.425,73.53 124.36,74.465 CN3.12@124.36,78.505
LED_G_K: CN3.11 R6.2 | length 6.6
  Top Layer w0.12: CN3.11@122.07,78.505 122.95,77.625 125.85,77.625 126.708,78.483 R6.2@127.932,78.483
LED_STLK: R130.2 R131.2 U13.D15 | length 33.5
  Top Layer w0.12: v1(111.975,9.275) 119.326,9.275 R130.2@119.336,9.264 R131.2@120.836,9.264 ; v1(112.308,32.902) U13.D15@112.633,32.577
  Bottom Layer w0.12: v1(111.975,9.275) 111.975,22.832 112.063,22.92 112.063,25.507 112.776,26.219 112.776,31.141 112.308,31.608 v1(112.308,32.902)
LED_Y_A: CN3.10 R71.2 U9.2 | length 35.3
  Top Layer w0.12: U9.2@118.7,49.05 v1(119.8,49.05) 120.45,48.4 R71.2@121.1,48.4
  Bottom Layer w0.127: CN3.10@112.53,78.505 112.53,72.995 118.425,67.1 118.425,63.2 120.034,61.591 120.034,49.283 v1(119.8,49.05)
LED_Y_K: CN3.9 R13.2 | length 3.7
  Top Layer w0.12: CN3.9@110.24,78.505 110.24,76.91 110.6,76.55 R13.2@110.6,75
MCO: C72.2 R88.2 TP3.1 | length 5.7
  Top Layer w0.12: TP3.1@112.261,41.514 112.261,36.864 C72.2@112.236,36.839 R88.2@113.236,36.839
MEMS_LED: CN20.12 U6.G12 | length 81.6
  Top Layer w0.127: U6.G12@64.7,60.525 v1(65.3,60.525)
  Signal Layer 3 w0.09: 7.06,40.767 8.45,40.767
  Signal Layer 3 w0.12: 8.45,40.767 v1(16.742,40.767) ; v1(18.325,61.975) 19.05,61.25 20.325,61.25 20.7,61.625 30.05,61.625 30.639,61.036 45.795,61.036 46.395,60.436 52.361,60.436 53.2,61.275 54,61.275 54.375,60.9 60.45,60.9 60.825,60.525 v1(65.3,60.525)
  Signal Layer 3 w0.127: CN20.12@6.425,41.402 7.06,40.767
  Bottom Layer w0.12: v1(16.742,40.767) 18.325,42.35 18.325,47.6
  Bottom Layer w0.127: 18.325,47.6 v1(18.325,61.975)
MIC_CLK: SB38.1 SB40.1 U33.3 | length 4.6
  Bottom Layer w0.12: U33.3@39.074,4.073 39.349,4.073 40.299,3.123 SB38.1@41.799,3.123 SB40.1@41.799,1.673
MIC_DATA: SB28.1 SB39.1 U33.4 | length 34.7
  Top Layer w0.12: v1(34.1,24.625) SB28.1@34.1,26.775
  Bottom Layer w0.12: v1(34.1,24.625) 34.1,10.875 30.6,7.375 30.6,2.95 31.875,1.675 SB39.1@36.4,1.675 36.4,3.024 37.449,4.073 U33.4@37.724,4.073
NetB2_3: B2.3 B2.4 C138.2 R141.1 R142.2 U32.1 | length 15
  Bottom Layer w0.12: C138.2@147.775,55.4 R141.1@147.775,54.4 R142.2@147.775,53.35 147.775,52.175 U32.1@147.95,52 148,51.95 B2.3@149.925,51.95 B2.4@149.925,61.45
NetC1_2: C1.2 C2.2 C7.2 C8.2 C9.1 D1.2 L1.2 R11.2 R17.2 | length 70.3
  Top Layer w0.6: C7.2@98.736,83.589 99.061,83.589 99.661,82.989 C1.2@101.461,82.989 C2.2@104.586,82.989 104.751,82.825 105.425,82.825 105.375,82.775 105.525,82.625 105.525,81.85 v1(105.725,81.65) ; L1.2@102.656,71.614 102.656,72.281 102.864,72.489 R17.2@104.761,72.489 105.375,73.103 v1(105.375,74.475) ; v1(127.589,82.889) C9.1@128.961,82.889 129.086,83.014 C8.2@129.086,84.214 131.551,84.214 D1.2@131.561,84.204 137.221,84.204 139.461,81.964 R11.2@139.461,76.914
  Signal Layer 3 w0.6: v1(105.375,74.475) 108.15,77.25 109.225,77.25 111.725,74.75 123.95,74.75 127.589,78.389 v1(127.589,82.889)
  Bottom Layer w0.6: v1(105.375,74.475) 105.725,74.825 v1(105.725,81.65)
NetC9_2: C9.2 C13.1 C52.2 C59.2 C60.1 D1.1 D7.1 R10.2 R74.1 R75.1 U8.8 U8.EP | length 76.4
  Top Layer w0.381: v1(101.711,43.414) C59.2@101.711,44.764 ; v1(103.325,43.414) 103.336,43.425 R74.1@103.336,44.264 ; v1(104.961,43.414) C60.1@104.961,44.764 ; v1(106.361,43.414) R75.1@106.361,44.764
  Top Layer w0.4: U8.8@104.851,48.396 106.107,48.396 C52.2@106.157,48.446
  Top Layer w0.6: C52.2@106.157,48.446 v1(107.05,48.446) 107.321,48.446 108.339,49.464 D7.1@108.836,49.464 ; v1(129.897,79.889) C13.1@129.111,79.889 129.111,81.039 C9.2@128.961,81.189 130.336,81.189 131.351,80.174 D1.1@131.561,80.174 133.326,80.174 134.361,79.139 R10.2@134.361,76.914
  Signal Layer 3 w0.6: v1(107.05,48.446) 109.354,50.75 114.45,50.75 115.25,51.55 131.425,51.55 v1(132.35,52.475)
  Bottom Layer w0.6: v1(129.897,79.889) 129.897,68.478 133.65,64.725 133.65,53.775 v1(132.35,52.475)
  other v1: 101.076,49.696 102.576,49.696 104.076,49.696 104.076,51.15 102.576,51.196 101.076,51.225 101.076,52.696 102.6,52.696 104.076,52.696
NetC10_2: C10.2 C15.1 C16.1 C17.1 C20.1 | length 32
  Top Layer w0.12: v1(132.411,76) C15.1@132.411,76.964
  Top Layer w0.6: C10.2@107.286,78.214 107.036,78.214 106.336,77.514 C16.1@106.336,76.789 C17.1@107.711,76.789 108.136,76.789 v1(108.45,76.475) ; C20.1@132.411,75.089 v1(132.411,76)
  Signal Layer 3 w0.6: v1(108.45,76.475) 108.925,76.475 111.5,73.9 124.275,73.9 124.6,74.225 130.636,74.225 v1(132.411,76)
NetC11_2: C11.2 C12.2 D2.2 R2.1
NetC12_1: C12.1 R7.2 | length 1.6
  Top Layer w0.6: R7.2@75.436,77.964 C12.1@75.436,79.589
NetC14_1: C14.1 R5.1 | length 2.2
  Top Layer w0.6: C14.1@101.911,77.214 101.911,78.114 102.686,78.889 R5.1@102.686,79.114
NetC15_2: C15.2 R9.1 | length 1.4
  Top Layer w0.12: R9.1@129.638,76.959 R9.1@129.643,76.964
  Top Layer w0.6: R9.1@129.643,76.964 C15.2@131.011,76.964
NetC16_2: C16.2 R14.1 | length 1.4
  Top Layer w0.6: C16.2@106.336,75.389 106.4,75.326 106.4,74.451 R14.1@106.711,74.139
NetC17_2: C17.2 R15.1 | length 1.8
  Top Layer w0.6: C17.2@107.711,75.389 108.072,75.389 108.586,74.875 R15.1@108.586,74.139
NetC19_1: C19.1 D4.4 D5.4 R10.1 | length 15.5
  Top Layer w0.6: D4.4@125.336,72.354 126.857,73.875 132.841,73.875 D5.4@134.361,72.354 134.379,72.354 136.086,74.061 C19.1@136.086,75.164 R10.1@134.361,75.164
NetC19_2: C19.2 D4.3 D5.3 R11.1 | length 16.1
  Top Layer w0.6: D4.3@130.436,72.354 132.101,70.689 137.796,70.689 D5.3@139.461,72.354 139.371,72.354 137.486,74.239 C19.2@137.486,75.164 R11.1@139.461,75.164
NetC20_2: C20.2 R12.1 | length 1.4
  Top Layer w0.6: R12.1@129.636,75.089 C20.2@131.011,75.089
NetC21_2: C21.2 U1.4 | length 2
  Top Layer w0.45: C21.2@78.211,73.039 78.411,73.039 78.9,72.551 U1.4@78.9,71.4
NetC22_2: C22.2 SB3.1 | length 1.4
  Top Layer w0.35: SB3.1@64.225,69.725 C22.2@64.225,71.175
NetC25_1: C25.1 R18.1 U2.1 | length 3.7
  Top Layer w0.6: R18.1@90.411,71.964 90.411,71.436 90.161,71.186 C25.1@90.161,70.339 90.811,70.339 91.626,69.524 U2.1@91.786,69.524
NetC27_1: C27.1 C29.1 C31.2 R26.1 U3.3 | length 6.1
  Top Layer w0.6: U3.3@85.711,66.864 86.386,67.539 C27.1@87.461,67.539 C29.1@88.761,67.539 C31.2@88.761,66.164 R26.1@88.761,64.764
NetC27_2: C27.2 R19.1 R20.1 R21.2 R23.1 U3.4 | length 8
  Top Layer w0.6: R19.1@85.411,72.164 R21.2@85.411,70.739 R21.2@85.601,70.55 ; R20.1@87.111,70.989 86.672,70.55 R21.2@85.601,70.55 ; R23.1@88.761,68.939 C27.2@87.461,68.939 85.836,68.939 U3.4@85.711,69.064 85.711,70.439 R21.2@85.601,70.55
NetC28_2: C28.2 R22.1 | length 1.4
  Top Layer w0.12: C28.2@101.286,67.839 R22.1@101.286,69.214
NetC29_2: C29.2 R23.2 | length 1.4
  Top Layer w0.6: C29.2@90.161,67.539 R23.2@90.161,68.939
NetC31_1: C31.1 R26.2 U2.2 | length 4.9
  Top Layer w0.6: R26.2@90.161,64.764 C31.1@90.161,66.164 91.364,66.164 91.786,66.586 U2.2@91.786,68.254
NetC34_1: C34.1 C36.1 C55.1 C56.2 C61.1 C62.2 L4.1 R76.2 R77.2 R78.2 R79.2 SB9.1 U9.1 U9.19 | length 32.7
  Top Layer w0.2: v1(113.75,46.375) 113.75,45.65 C61.1@114.125,45.275 ; C61.1@114.125,45.325 114.275,45.475 114.275,45.95 115.5,47.175 U9.19@115.5,47.85 ; v1(115.125,43.85) R76.2@115.125,44.375 ; v1(116.2,43.85) R77.2@116.2,44.375 ; v1(117.275,43.85) R78.2@117.275,44.375 ; v1(118.35,43.85) R79.2@118.35,44.375 ; U9.1@118.7,48.55 119.375,48.55 120.5,47.425 C55.1@121.1,47.425 121,47.325 121,46.425 C56.2@120.85,46.275
  Top Layer w0.35: v1(111.35,46.8) 111.875,46.275 L4.1@111.875,44.95 C62.2@111.875,43.725 v1(112.45,43.725)
  Top Layer w0.381: v1(115.3,59.325) 115.85,59.875 C36.1@115.85,60.25 C34.1@115.85,61.3 117.45,61.3 SB9.1@117.65,61.1
  Signal Layer 2 w0.6: v1(111.35,46.8) 112.575,48.025 112.575,56.6 v1(115.3,59.325)
  other v1: 120.025,47.9
NetC35_2: C35.2 L2.2 U6.G1 | length 5.3
  Top Layer w0.25: U6.G1@71.85,60.525 72.475,60.525
  Top Layer w0.35: 72.475,60.525 74.425,60.525 74.575,60.375 75.575,60.375 C35.2@75.6,60.35 76.025,59.925 76.625,59.925 L2.2@76.825,59.725
NetC38_2: C38.2 SB13.1 | length 1.7
  Top Layer w0.35: SB13.1@79.225,58.225 C38.2@80.875,58.225
NetC39_2: C39.2 R47.1 U8.13 | length 3.7
  Top Layer w0.4: C39.2@100.461,56.139 R47.1@101.811,56.139 102.251,55.7 U8.13@102.251,53.996
NetC40_2: C40.2 R8.1 U8.12 | length 29.1
  Top Layer w0.4: U8.12@102.901,53.996 v1(102.901,55.376) 103.211,55.686 C40.2@103.211,56.139
  Top Layer w0.508: R8.1@103.261,77.189 103.261,77.501 v1(103.6,77.839)
  Bottom Layer w0.508: v1(102.901,55.376) 102.425,55.852 102.425,61.2 100.264,63.361 100.264,65.364 100.75,65.85 102.116,65.85 103.95,67.684 103.95,69.7 103.6,70.05 v1(103.6,77.839)
NetC41_2: C41.2 C42.2 D3.2 R8.2 U8.11 | length 29.7
  Top Layer w0.4: U8.11@103.551,53.996 103.551,55.151 104.539,56.139 C41.2@104.586,56.139 C42.2@105.961,56.139 v1(106.889,56.139)
  Top Layer w0.55: D3.2@104.436,78.844 104.436,78.175 104.661,77.95 R8.2@104.661,77.189
  Top Layer w0.6: v1(104.661,76.239) R8.2@104.661,77.189
  Bottom Layer w0.6: v1(104.661,76.239) 104.475,76.052 104.475,73.425 107.975,69.925 107.975,57.225 v1(106.889,56.139)
NetC43_2: C43.2 L3.2 U6.F1 | length 7.5
  Top Layer w0.25: U6.F1@71.85,59.875 71.85,59.889 71.861,59.9 73.125,59.9
  Top Layer w0.35: 73.125,59.9 74.875,58.15 74.875,57.475 75.6,56.75 L3.2@76.075,56.75 C43.2@77.625,56.75
NetC44_2: C44.2 SB16.1 | length 1.1
  Top Layer w0.35: C44.2@55.95,55.475 57.05,55.475
NetC45_2: C45.2 R54.2 X2.1 | length 3.1
  Top Layer w0.12: R54.2@77.325,54.975 77.325,55.2 77.775,55.65 C45.2@78.275,55.65 79.775,55.65 X2.1@79.925,55.5
NetC48_2: C48.2 R62.2 X2.2 | length 3.1
  Top Layer w0.12: R62.2@77.325,53.525 77.325,53.3 77.775,52.85 C48.2@78.275,52.85 79.775,52.85 X2.2@79.925,53
NetC50_2: C50.2 C51.2 U9.6 | length 3.9
  Top Layer w0.12: U9.6@118.7,51.05 119.6,51.05 120.1,51.55 C51.2@121.1,51.55 121.1,52.45 C50.2@120.85,52.7
NetC53_2: C53.2 SB19.1 | length 1.4
  Top Layer w0.35: C53.2@67.65,49.7 SB19.1@67.65,51.15
NetC57_1: C57.1 U8.2 | length 3.7
  Top Layer w0.4: C57.1@98.961,46.164 98.961,46.686 99.45,47.175 100.6,47.175 100.951,47.526 U8.2@100.951,48.396
NetC58_1: C58.1 U8.3 | length 2.8
  Top Layer w0.4: C58.1@100.336,46.164 100.414,46.164 101.6,47.35 U8.3@101.6,48.396
NetC59_1: C59.1 R17.1 U8.4 | length 28.7
  Top Layer w0.4: C59.1@101.711,46.164 102.251,46.704 v1(102.251,47.025) U8.4@102.251,48.396
  Top Layer w0.508: v1(104.761,69.939) R17.1@104.761,70.739
  Bottom Layer w0.508: v1(102.251,47.025) 103.18,47.025 105.075,48.92 105.075,52.35 105.9,53.175 105.9,68.8 v1(104.761,69.939)
NetC60_2: C60.2 U8.6 | length 2.9
  Top Layer w0.4: U8.6@103.551,48.396 103.551,47.374 104.761,46.164 C60.2@104.961,46.164
NetC64_1: C64.1 U12.G8 | length 7.9
  Top Layer w0.09: 35.9,34.375 36.475,34.375 U12.G8@36.725,34.125
  Top Layer w0.1: 33.2,36.8 34.3,36.8 35.425,35.675 35.425,34.75 35.8,34.375 35.9,34.375
  Top Layer w0.12: 33.2,36.8 33.025,36.8 32.85,36.975 32.85,38.025 33.65,38.825 C64.1@33.75,38.825
NetC64_2: C64.2 U12.H8 | length 4.2
  Top Layer w0.1: C64.2@33.75,37.425 33.875,37.425 34.3,37 34.45,37 35.725,35.725 35.725,35.625 U12.H8@36.725,34.625
NetC65_2: C65.2 U12.G7 | length 4.2
  Top Layer w0.09: 36.975,34.95 36.975,34.375 U12.G7@37.225,34.125
  Top Layer w0.1: C65.2@35.125,37.425 35.125,36.9 36.975,35.05 36.975,34.95
NetC66_2: C66.2 U12.H7 | length 3.1
  Top Layer w0.1: C66.2@36.5,37.425 36.5,36.15 37.225,35.425 U12.H7@37.225,34.625
NetC67_2: C67.2 U13.M10 | length 7
  Top Layer w0.12: U13.M10@117.833,29.327 118.158,29.652 118.158,33.177 120.131,35.15 C67.2@120.381,35.15
NetC68_1: C68.1 CN10.4 U12.G6 U19.1 | length 43.3
  Top Layer w0.09: 37.475,34.95 37.475,34.375 U12.G6@37.725,34.125
  Top Layer w0.1: 37.475,34.95 v1(37.475,36.225) 38.125,36.875 38.625,36.875 C68.1@39.1,37.35
  Top Layer w0.12: CN10.4@28.775,5.8 28.775,20.475 30.35,22.05 U19.1@37.5,22.05
  Bottom Layer w0.1: 35.85,27.5 35.85,34.6 v1(37.475,36.225)
  Bottom Layer w0.12: v1(35.85,22.05) 35.85,25.047 35.93,25.127 35.93,25.543 35.85,25.623 35.85,27.5
NetC68_2: C68.2 R84.2 | length 1.4
  Top Layer w0.12: R84.2@37.9,38.825 38.125,38.6 38.75,38.6 C68.2@39.1,38.25
NetC69_1: C69.1 CN10.6 U12.H6 U19.3 | length 30.3
  Top Layer w0.1: U12.H6@37.725,34.625 37.725,35.892 38.433,36.6 v1(39.275,36.6) C69.1@40.025,37.35
  Top Layer w0.12: CN10.6@35.675,13.2 35.675,19.525 v1(36.3,20.15) U19.3@37.5,20.15
  Bottom Layer w0.1: 36.3,27.5 36.3,33.625 v1(39.275,36.6)
  Bottom Layer w0.12: v1(36.3,20.15) 36.3,27.5
NetC69_2: C69.2 R85.2 | length 1.4
  Top Layer w0.12: C69.2@40.025,38.25 40.375,38.6 41,38.6 R85.2@41.225,38.825
NetC71_2: C71.2 U13.J14 | length 4.9
  Top Layer w0.127: U13.J14@115.883,31.927 116.225,32.269 116.225,33.1 118.411,35.286 C71.2@118.411,35.764